# Altium PCB 20K Control Board V1.1.PcbDoc (part 2 of 24)
Units mm, origin at the board's own origin, x right, y up, seen from the top; angles counter-clockwise.
Board outline 132 x 260 mm, 4 copper layers (Top Layer, GND, VCC, Bottom Layer); 1384 components, 779 nets, 4515 pads, 1774 vias.
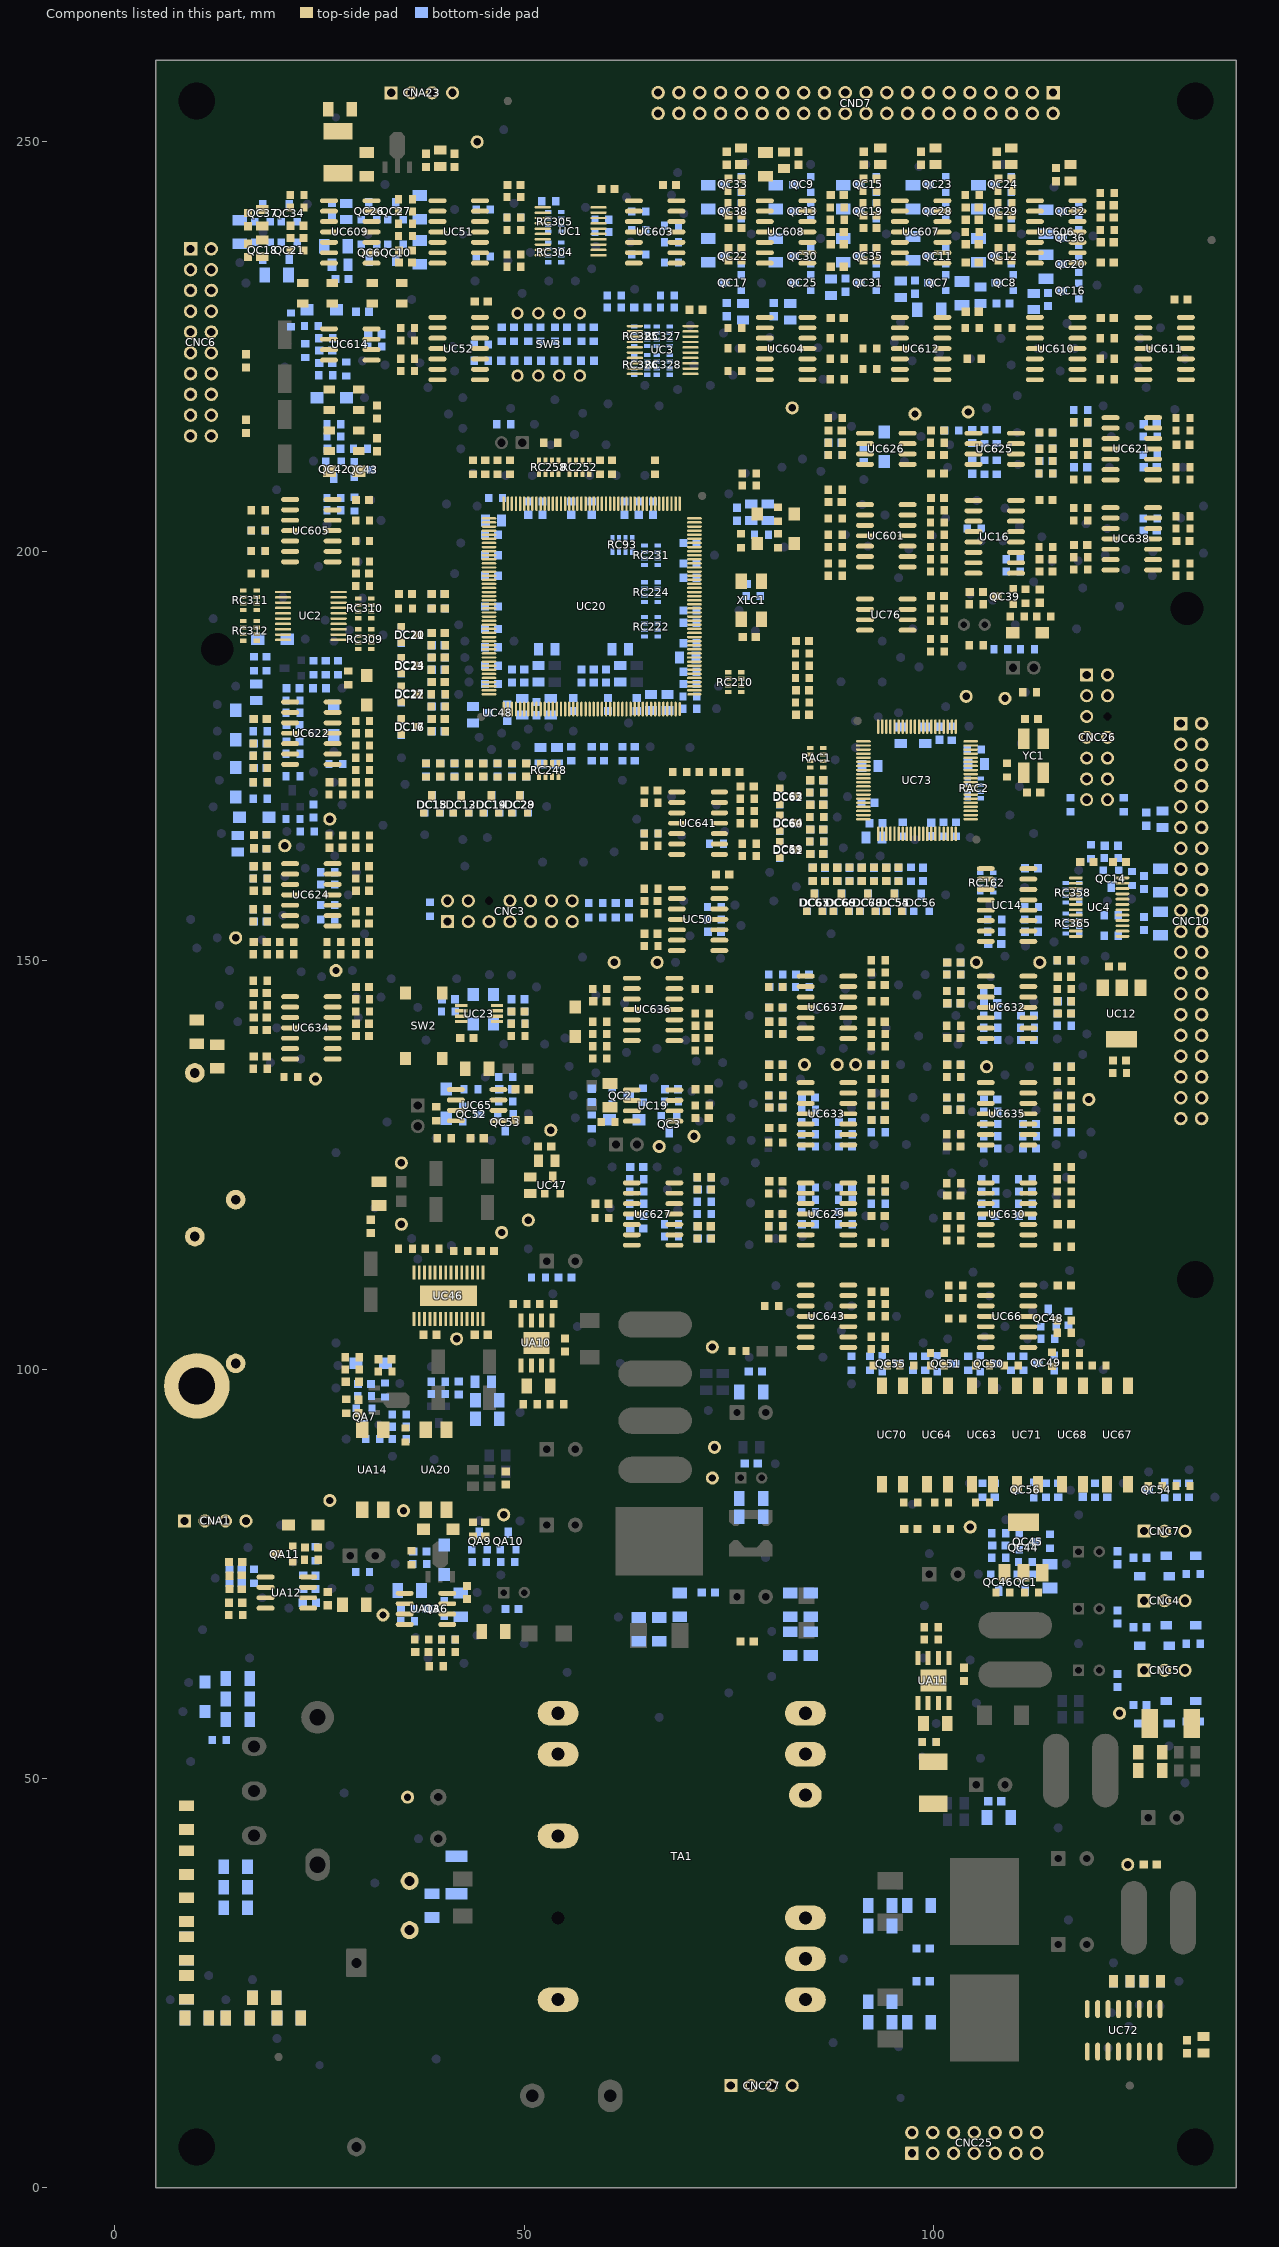
[diagram p4: the components of this part, seen from the top]

## Components (designator, comment, footprint, x,y, rotation, side; value= is the part's Value field where it differs from the comment) (continued)
QC45 "061-010000-0" SOT-23 110.5,78 r90 bottom locked (schematic designator QA4)
QC46 "061-110000-0" SOT-23 107,75 r0 bottom locked (schematic designator QA4)
QC48 "061-110000-0" SOT-23 115,105.25 r180 bottom locked
QC49 "061-010000-0" SOT-23 114.75,101.75 r270 bottom locked
QC50 "061-010000-0" SOT-23 105.75,99.75 r90 bottom locked
QC51 "061-010000-0" SOT-23 100.5,99.75 r90 bottom locked
QC52 "061-010000-0" SOT-23 42.5,130.25 r90 bottom locked
QC53 "061-110000-0" SOT-23 46.75,131.25 r0 bottom locked
QC54 "061-010000-0" SOT-23 128.25,86.25 r270 bottom locked
QC55 "061-010000-0" SOT-23 93.75,99.75 r90 bottom locked
QC56 "061-010000-0" SOT-23 112.25,86.25 r270 bottom locked
RA108 "011-470050-0" R3216-1206 66.5,68.25 r90 bottom locked
RA109 "011-470050-0" R3216-1206 64,68.25 r90 bottom locked
RA110 "013-390240-0" R3WA-5.0-S 36,37.5 r270 top locked
RA111 "011-000020-0" R1608-0603 51.75,111.25 r0 bottom locked
RA112 "NC" R3216-1206 77.75,97.25 r0 bottom locked
RA113 "011-103020-0" R1608-0603 54,95.75 r180 top locked
RA114 "011-227070-0" R5025-2010 41.75,38.25 r90 bottom locked
RA115 "011-103020-0" R1608-0603 52.75,108 r0 top locked
RA116 "011-152020-0" R1608-0603 50.75,95.75 r180 top locked
RA117 "011-322020-0" R1608-0603 49.5,108 r0 top locked
RA118 "011-470050-0" R3216-1206 82.5,66.5 r90 bottom locked
RA119 "011-302050-0" R3216-1206 77.75,82 r0 bottom locked
RA120 "NC" R3216-1206 77.75,84.25 r0 bottom locked
RA121 "011-470050-0" R3216-1206 85,66.5 r90 bottom locked
RA122 "NC" R1608-0603 30.25,75.25 r0 bottom locked
RA123 "011-100050-0" R3216-1206 46.25,68 r180 top locked
RA124 "011-104050-0" R3216-1206 8.75,45.25 r270 top locked
RA125 "011-104050-0" R3216-1206 21.25,20.75 r180 top locked
RA126 "011-000020-0" R1608-0603 101.25,80.5 r180 top locked
RA127 "011-470050-0" R3216-1206 93.5,22.75 r0 bottom locked
RA128 "011-104050-0" R3216-1206 8.75,39.75 r270 top locked
RA129 "011-302050-0" R3216-1206 126.5,53.25 r180 top locked
RA130 "011-104050-0" R3216-1206 18.25,23.25 r180 top locked
RA131 "011-470050-0" R3216-1206 93.5,20.25 r0 bottom locked
RA132 "NC" R3216-1206 126.5,51 r180 top locked
RA133 "011-103020-0" R1608-0603 99.5,54.5 r180 bottom locked
RA134 "011-103020-0" R1608-0603 99.75,68.5 r0 top locked
RA135 "011-104050-0" R3216-1206 8.75,34 r270 top locked
RA136 "011-104050-0" R3216-1206 15,20.75 r180 top locked
RA137 "NC" R3216-1206 108,45.25 r180 bottom locked
RA138 "011-272020-0" R1608-0603 99.5,54.5 r180 top locked
RA139 "011-104050-0" R3216-1206 8.75,29.25 r270 top locked
RA140 "011-322020-0" R1608-0603 99.75,67 r180 top locked
RA141 "011-104050-0" R3216-1206 10,20.75 r180 top locked
RA142 "011-104050-0" R3216-1206 8.75,24.5 r90 top locked
RA143 "011-470050-0" R3216-1206 93.5,34.5 r0 bottom locked
RA144 "011-470050-0" R3216-1206 93.5,32 r0 bottom locked
RA145 "011-680050-0" R3216-1206 15,57.25 r0 bottom locked
RA146 "NC" R3216-1206 15,62.25 r0 bottom locked
RA147 "011-491050-0" R3216-1206 42.25,71.25 r270 bottom locked
RA148 "011-680050-0" R3216-1206 15,59.75 r0 bottom locked
RA149 "011-102020-0" R1608-0603 14.75,70 r0 top locked
RA150 "011-103020-0" R1608-0603 12.75,54.75 r180 bottom locked
RA151 "011-493020-0" R1608-0603 23,74 r270 bottom locked
RA152 "011-307050-0" R3216-1206 14.75,39.25 r0 bottom locked
RA153 "011-307050-0" R3216-1206 14.75,36.75 r0 bottom locked
RA154 "011-307050-0" R3216-1206 14.75,34.25 r0 bottom locked
RA155 "011-102020-0" R1608-0603 33,97.5 r90 bottom locked
RA156 "011-103020-0" R1608-0603 37.25,76.25 r0 bottom locked
RA157 "011-403020-0" R1608-0603 40.75,67 r0 top locked
RA158 "011-332020-0" R1608-0603 34.75,93 r0 bottom locked
RA159 "011-103020-0" R1608-0603 34.75,94.5 r0 bottom locked
RA160 "011-332020-0" R1608-0603 34.75,91.5 r0 bottom locked
RA161 "011-202020-0" R1608-0603 39.25,63.75 r180 top locked
RA162 "011-333020-0" R1608-0603 40.75,65.5 r0 top locked
RA163 "011-103020-0" R1608-0603 30.5,96.75 r0 bottom locked
RA164 "011-153020-0" R1608-0603 37.5,67 r0 top locked
RA165 "011-122020-0" R1608-0603 44.5,76.5 r0 bottom locked
RA166 "011-472020-0" R1608-0603 15.5,74 r270 top locked
RA167 "011-332020-0" R1608-0603 36.25,77 r270 top locked
RA168 "011-102020-0" R1608-0603 31.5,91.5 r0 bottom locked
RA169 "011-332020-0" R1608-0603 48,76.5 r180 bottom locked
RA170 "011-331020-0" R1608-0603 29,101.5 r0 top locked
RA171 "011-493020-0" R1608-0603 40.75,67 r180 bottom locked
RA172 "011-106050-0" R3216-1206 8.75,29.25 r90 bottom locked
RA173 "011-494050-0" R3216-1206 21.25,20.75 r0 bottom locked
RA174 "011-494050-0" R3216-1206 18.25,23.25 r180 bottom locked
RA175 "011-106050-0" R3216-1206 8.75,24.5 r90 bottom locked
RA176 "011-494050-0" R3216-1206 10,20.75 r0 bottom locked
RA177 "011-494050-0" R3216-1206 15,20.75 r180 bottom locked
RA178 "011-472020-0" R1608-0603 14,74.75 r270 bottom locked
RA179 "011-303020-0" R1608-0603 35.75,69.25 r180 bottom locked
RA180 "011-123020-0" R1608-0603 29,100 r180 top locked
RA181 "011-103020-0" R1608-0603 28.25,95.5 r270 top locked
RA182 "NC" R1608-0603 24.5,77.5 r270 bottom locked
RA183 "NC" R1608-0603 24,76.75 r180 top locked
RA184 "011-332020-0" R1608-0603 33,99.75 r180 top locked
RA185 "011-472020-0" R1608-0603 17,74.75 r90 bottom locked
RA186 "011-472020-0" R1608-0603 43.75,80.5 r270 top locked
RA187 "011-102020-0" R1608-0603 39.5,98.5 r180 bottom locked
RA188 "011-104020-0" R1608-0603 39.5,97 r180 bottom locked
RA192 "011-143020-0" R1608-0603 76.25,102.25 r180 top locked (schematic designator RE1)
RA198 "011-102050-0" R3216-1206 45.5,96.25 r0 bottom locked
RA200 "011-102050-0" R3216-1206 45.5,94 r0 bottom locked
RA204 "011-202020-0" R1608-0603 35.5,92 r270 top locked
RA215 "011-472020-0" R1608-0603 45.25,80.5 r270 top locked
RAC1 "019-472000-0" R0603SM*4 85.75,174.75 r90 top locked
RAC2 "019-472000-0" R0603SM*4 105,171 r90 bottom locked
RC1 "011-103020-0" R1608-0603 30.25,160 r180 top locked
RC2 "011-492020-0" R1608-0603 26,159.25 r180 bottom locked
RC3 "011-272020-0" R1608-0603 59.5,118.5 r180 top locked
RC4 "011-272020-0" R1608-0603 30.25,165.25 r0 top locked
RC5 "011-273020-0" R0603SM 63.75,118.75 r0 bottom locked
RC6 "011-492020-0" R1608-0603 63.75,120.25 r0 bottom locked
RC7 "011-492020-0" R1608-0603 68,116.25 r0 bottom locked
RC8 "011-492020-0" R1608-0603 68,117.75 r180 bottom locked
RC9 "011-153020-0" R1608-0603 102.5,137.25 r180 bottom locked
RC10 "011-492020-0" R1608-0603 102.5,135.75 r180 top locked
RC11 "011-272020-0" R1608-0603 30.25,163.75 r0 top locked
RC12 "011-492020-0" R1608-0603 102.5,148.25 r180 top locked
RC13 "011-153020-0" R1608-0603 102.5,148.25 r180 bottom locked
RC14 "011-272020-0" R1608-0603 72,116 r0 top locked
RC15 "011-492020-0" R1608-0603 26,160.75 r180 bottom locked
RC16 "011-491020-0" R1608-0603 102.5,135.75 r0 bottom locked
RC17 "011-153020-0" R1608-0603 102.5,133.25 r0 top locked
RC18 "011-491020-0" R1608-0603 102.5,149.75 r0 bottom locked
RC19 "011-492020-0" R1608-0603 63.75,121.75 r180 bottom locked
RC20 "011-103020-0" R1608-0603 27,165.25 r180 top locked
RC21 "011-273020-0" R0603SM 63.75,123.25 r0 bottom locked
RC22 "011-153020-0" R1608-0603 102.5,146.25 r0 top locked
RC23 "011-101020-0" R1608-0603 107,130 r0 bottom locked
RC24 "011-101020-0" R1608-0603 107,143.25 r0 bottom locked
RC25 "011-492020-0" R1608-0603 102.5,133.25 r180 bottom locked
RC26 "011-103020-0" R1608-0603 107,131.5 r0 bottom locked
RC27 "011-103020-0" R0603SM 35.5,240 r180 top locked
RC28 "011-103020-0" R0603SM 44.75,225.25 r0 bottom locked
RC29 "011-492020-0" R1608-0603 102.5,146.25 r180 bottom locked
RC30 "011-103020-0" R1608-0603 30.25,156 r0 top locked
RC31 "011-103020-0" R1608-0603 107,146.25 r0 bottom locked
RC32 "011-492020-0" R1608-0603 26,156.75 r180 bottom locked
RC33 "011-272020-0" R1608-0603 26.75,152.25 r180 top locked
RC34 "011-101020-0" R1608-0603 107,128.5 r0 bottom locked
RC35 "011-103020-0" R1608-0603 102.5,128.75 r0 top locked
RC36 "011-103020-0" R0603SM 105,223.5 r0 top locked
RC37 "011-103020-0" R1608-0603 102.5,142 r0 top locked
RC38 "011-102020-0" R1608-0603 116,132 r180 top locked
RC39 "011-272020-0" R1608-0603 26.75,150.75 r180 top locked
RC40 "011-103020-0" R0603SM 92.25,224.75 r180 top locked
RC41 "011-102020-0" R1608-0603 116,145 r180 top locked
RC42 "011-101020-0" R1608-0603 107,141.75 r0 bottom locked
RC43 "011-103020-0" R0603SM 73.25,156.5 r0 bottom locked
RC44 "011-103020-0" R1608-0603 116,146.5 r0 top locked
RC45 "011-103020-0" R1608-0603 116,135.25 r0 top locked
RC46 "011-492020-0" R1608-0603 26,155 r180 bottom locked
RC47 "011-103050-0" R1206SM 114.25,74.75 r270 bottom locked
RC48 "011-103020-0" R1608-0603 30.25,150.75 r0 top locked
RC49 "011-101020-0" R0603SM 111.25,76.5 r180 bottom locked
RC50 "011-491020-0" R1608-0603 116,137 r180 top locked
RC51 "011-102020-0" R1608-0603 116,129 r180 bottom locked
RC52 "011-491020-0" R1608-0603 116,150 r180 top locked
RC53 "011-102020-0" R1608-0603 116,142 r180 bottom locked
RC54 "011-103020-0" R1608-0603 17.75,156.25 r180 bottom locked
RC55 "011-491020-0" R1608-0603 116,137 r180 bottom locked
RC56 "011-491020-0" R1608-0603 116,150 r180 bottom locked
RC57 "011-101020-0" R1608-0603 17.75,156.25 r180 top locked
RC58 "011-304021-0" R1608-0603 107,127 r180 bottom locked
RC59 "011-304021-0" R1608-0603 111.75,128.5 r180 bottom locked
RC60 "011-272020-0" R1608-0603 21,152.25 r180 top locked
RC61 "011-103020-0" R1608-0603 116,132 r180 bottom locked
RC62 "011-304021-0" R1608-0603 107,140.25 r180 bottom locked
RC63 "011-304021-0" R1608-0603 111.5,141.75 r180 bottom locked
RC64 "011-103020-0" R1608-0603 116,143.5 r180 bottom locked
RC65 "011-272020-0" R1608-0603 93.25,115.5 r0 top locked
RC66 "011-273020-0" R0603SM 84.75,119.25 r0 bottom locked
RC67 "011-492020-0" R1608-0603 84.75,120.75 r0 bottom locked
RC68 "011-492020-0" R1608-0603 80.75,117.5 r0 bottom locked
RC69 "011-101020-0" R1608-0603 17.75,154.75 r180 top locked
RC70 "011-492020-0" R1608-0603 80.75,117.5 r180 top locked
RC71 "011-103020-0" R1608-0603 17.75,150.75 r180 top locked
RC72 "011-272020-0" R1608-0603 80.75,116 r180 top locked
RC73 "011-492020-0" R1608-0603 84.75,122.25 r180 bottom locked
RC74 "011-103020-0" R1608-0603 17.75,160 r180 top locked
RC75 "011-273020-0" R0603SM 80.75,121.5 r180 top locked
RC76 "011-101020-0" R1608-0603 17.75,160 r180 bottom locked
RC77 "011-101020-0" R0603SM 108.5,72.75 r0 top locked
RC78 "011-202020-0" R0603SM 108,80 r180 bottom locked
RC79 "011-272020-0" R1608-0603 18.5,164.5 r90 bottom locked
RC80 "011-103020-0" R0603SM 112,72.75 r180 top locked
RC81 "011-302020-0" R0603SM 131.75,57 r0 bottom locked
RC82 "011-302020-0" R0603SM 131.75,66.5 r0 bottom locked
RC83 "011-153020-0" R1608-0603 80.75,135.75 r0 bottom locked
RC84 "011-492020-0" R1608-0603 80.75,135.75 r0 top locked
RC85 "011-302020-0" R0603SM 131.75,75 r0 bottom locked
RC86 "011-000020-0" R0603SM 114.25,79 r90 bottom locked
RC87 "011-101020-0" R1608-0603 17.75,161.5 r180 bottom locked
RC88 "011-103020-0" R1608-0603 18.5,164.5 r270 top locked
RC89 "011-103020-0" R0603SM 108,77 r0 bottom locked
RC90 "011-472020-0" R0603SM 102.75,166 r90 bottom locked
RC91 "011-491020-0" R1608-0603 80.75,137.25 r0 bottom locked
RC92 "011-472020-0" R0603SM 101.25,166 r90 bottom locked
RC93 "019-472000-0" R0603SM*4 62,200.75 r0 bottom locked
RC94 "011-153020-0" R1608-0603 80.75,133.5 r0 top locked
RC95 "011-472020-0" R0603SM 66,210.25 r90 top locked
RC99 "011-101020-0" R1608-0603 84.75,130.25 r0 bottom locked
RC100 "011-492020-0" R1608-0603 80.75,133.5 r180 bottom locked
RC101 "011-103020-0" R1608-0603 84.75,131.75 r0 bottom locked
RC103 "011-403020-0" R1608-0603 106.25,210.25 r270 bottom locked
RC104 "011-492020-0" R0603SM 107.75,210.25 r90 bottom locked
RC105 "011-272020-0" R1608-0603 102.25,214.75 r0 bottom locked
RC106 "011-101020-0" R1608-0603 84.75,128.75 r0 bottom locked
RC107 "011-103020-0" R1608-0603 80.75,127.75 r0 top locked
RC108 "011-102020-0" R1608-0603 93.25,132.25 r180 top locked
RC109 "011-492020-0" R1608-0603 88,213.25 r180 top locked
RC110 "011-492020-0" R1608-0603 88,216.25 r0 top locked
RC111 "011-272020-0" R1608-0603 102.5,115.75 r180 top locked
RC112 "011-103020-0" R1608-0603 93.25,135.5 r0 top locked
RC113 "011-273020-0" R0603SM 106.75,120.25 r0 bottom locked
RC114 "011-103020-0" R1608-0603 80.75,146.75 r180 top locked
RC115 "011-512020-0" R1608-0603 88,211.75 r180 top locked
RC116 "011-492020-0" R1608-0603 106.75,121.75 r0 bottom locked
RC117 "011-492020-0" R1608-0603 102.5,118.75 r0 bottom locked
RC118 "011-492020-0" R0603SM 107.75,214 r270 bottom locked
RC119 "011-491020-0" R1608-0603 84,146.75 r180 bottom locked
RC122 "011-492020-0" R1608-0603 102.5,117.25 r180 top locked
RC124 "011-492020-0" R1608-0603 88,211.75 r180 bottom locked
RC125 "011-323020-0" R1608-0603 91.5,211.75 r270 bottom locked
RC126 "011-403020-0" R1608-0603 106.25,214 r270 bottom locked
RC127 "011-491020-0" R1608-0603 93.25,137.25 r180 bottom locked
RC128 "011-272020-0" R1608-0603 116,115 r0 top locked
RC129 "011-203020-0" R1608-0603 59.25,138 r0 top locked
RC130 "011-000020-0" R1608-0603 59.25,141 r180 top locked
RC131 "011-102020-0" R1608-0603 93.25,129 r180 bottom locked
RC132 "011-492020-0" R1608-0603 106.75,123.25 r180 bottom locked
RC133 "011-103020-0" R1608-0603 80.75,148.25 r180 bottom locked
RC134 "NC" R1608-0603 59.25,142.5 r180 top locked
RC135 "011-492020-0" R1608-0603 100.5,213.25 r0 top locked
RC136 "011-273020-0" R0603SM 102.5,122.75 r180 top locked
RC137 "011-491020-0" R1608-0603 93.25,137.25 r180 top locked
RC138 "011-304021-0" R1608-0603 84.75,127.25 r180 bottom locked
RC139 "011-304021-0" R1608-0603 89.25,128.75 r180 bottom locked
RC140 "011-103020-0" R1608-0603 93.25,132.25 r180 bottom locked
RC142 "011-403020-0" R1608-0603 113.75,209.5 r0 bottom locked
RC143 "011-103020-0" R1608-0603 80.75,141 r0 top locked
RC144 "011-103020-0" R1608-0603 80.75,142.5 r0 bottom locked
RC145 "011-492020-0" R1608-0603 113.75,212.5 r180 bottom locked
RC146 "011-272020-0" R1608-0603 113.75,209.5 r0 top locked
RC147 "011-103020-0" R1608-0603 80.75,141 r180 bottom locked
RC148 "011-472020-0" R1608-0603 76.5,201.25 r90 top locked
RC149 "011-491020-0" R1608-0603 71.75,139 r180 top locked
RC150 "011-472020-0" R1608-0603 80.75,144.25 r0 bottom locked
RC151 "011-492020-0" R1608-0603 113.75,214.5 r180 bottom locked
RC152 "011-403020-0" R1608-0603 113.75,211 r180 top locked
RC153 "011-472020-0" R1608-0603 81,204.5 r90 top locked
RC154 "011-104020-0" R1608-0603 81,201.25 r270 top locked
RC157 "011-103020-0" R1608-0603 71.75,143.5 r0 top locked
RC158 "011-103020-0" R1608-0603 122.75,136.25 r180 top locked
RC161 "011-472020-0" R1608-0603 71.75,146.5 r0 top locked
RC162 "019-472000-0" RN0603*4 106.5,159.5 r90 bottom locked
RC163 "011-492020-0" R1608-0603 93.25,141 r180 top locked
RC164 "011-102020-0" R1608-0603 118,203.75 r180 top locked
RC165 "011-103020-0" R1608-0603 72,117.5 r180 bottom locked
RC166 "011-272020-0" R1608-0603 118,205.25 r180 top locked
RC167 "011-492020-0" R1608-0603 72,119 r180 bottom locked
RC168 "011-492020-0" R1608-0603 72,122 r0 top locked
RC169 "011-492020-0" R1608-0603 72,123.5 r180 top locked
RC170 "011-472020-0" R1608-0603 112,156.5 r180 bottom locked
RC171 "011-272020-0" R1608-0603 93.25,139.5 r0 top locked
RC172 "011-102020-0" R1608-0603 107.5,153.5 r180 bottom locked
RC173 "011-472020-0" R1608-0603 107.5,155 r180 bottom locked
RC174 "011-492020-0" R1608-0603 93.25,148.5 r180 top locked
RC175 "011-272020-0" R1608-0603 93.25,150 r0 top locked
RC176 "011-102020-0" R1608-0603 112,155 r0 bottom locked
RC177 "011-492020-0" R1608-0603 72,120.5 r180 bottom locked
RC178 "011-103020-0" R1608-0603 72,123.5 r180 bottom locked
RC179 "011-103020-0" R1608-0603 89.25,117.75 r0 bottom locked
RC180 "011-492020-0" R1608-0603 93.25,120.25 r180 bottom locked
RC181 "011-492020-0" R1608-0603 93.25,121.75 r0 top locked
RC182 "011-494050-0" R3216-1206 12.5,138.25 r90 top locked
RC183 "011-272020-0" R1608-0603 21.5,135.75 r0 top locked
RC184 "011-492020-0" R1608-0603 93.25,123.25 r180 top locked
RC185 "013-515220-1" R3W-S 9.75,126.25 r270 top locked
RC186 "011-102020-0" R1608-0603 118,199.25 r180 top locked
RC187 "011-272020-0" R1608-0603 130.5,197 r180 top locked
RC188 "011-333020-0" R1608-0603 17.75,136.75 r0 top locked
RC189 "011-272020-0" R1608-0603 118,197.75 r180 top locked
RC190 "011-102020-0" R1608-0603 130.5,198.5 r180 top locked
RC191 "011-492020-0" R1608-0603 93.25,121.75 r180 bottom locked
RC192 "011-103020-0" R1608-0603 89.25,120.75 r0 bottom locked
RC193 "011-472020-0" R1608-0603 113.75,200.5 r0 top locked
RC194 "011-472020-0" R1608-0603 105,202.75 r180 bottom locked
RC195 "013-515220-1" R3W-S 14.75,110.75 r270 top locked
RC196 "011-102020-0" R1608-0603 109.75,199 r180 bottom locked
RC197 "011-102020-0" R1608-0603 109.75,197.5 r180 bottom locked
RC198 "011-103020-0" R1608-0603 111.25,120.25 r0 bottom locked
RC199 "011-492020-0" R1608-0603 116,120.25 r180 top locked
RC200 "011-492020-0" R1608-0603 116,124.75 r0 top locked
RC201 "011-492020-0" R1608-0603 116,123.25 r180 top locked
RC202 "011-492020-0" R1608-0603 116,121.75 r180 top locked
RC203 "011-103020-0" R1608-0603 111.25,123.25 r0 bottom locked
RC204 "011-202050-0" R3216-1206 60.5,133.5 r90 top locked
RC205 "011-102020-0" R1608-0603 60.25,130.25 r180 top locked
RC206 "011-493020-0" R1608-0603 71.75,132.25 r0 top locked
RC207 "011-491020-0" R1608-0603 47.5,215.5 r0 bottom locked
RC208 "011-102020-0" R1608-0603 64.5,133.5 r270 bottom locked
RC210 "019-472000-0" RN0603*4 75.75,184 r270 top locked
RC211 "011-102020-0" R1608-0603 58.25,130.25 r270 bottom locked
RC212 "011-472020-0" R1608-0603 48.25,210.25 r90 top locked
RC213 "011-102020-0" R1608-0603 68,132.75 r0 bottom locked
RC214 "011-472020-0" R1608-0603 46.75,210.25 r90 top locked
RC215 "011-472020-0" R1608-0603 45.25,210.25 r90 top locked
RC216 "011-472020-0" R1608-0603 43.75,210.25 r90 top locked
RC217 "011-472020-0" R1608-0603 46.5,206.5 r180 bottom locked
RC218 "011-101020-0" R1608-0603 41.5,173.25 r90 top locked
RC219 "011-101020-0" R1608-0603 43.25,173.25 r90 bottom locked
RC220 "011-101020-0" R1608-0603 45,173.25 r90 bottom locked
RC221 "011-102020-0" R1608-0603 84,184.5 r0 top locked
RC222 "019-472000-0" RN0603*4 65.5,190.75 r270 bottom locked
RC223 "011-472020-0" R1608-0603 100.5,203.5 r180 top locked
RC224 "019-472000-0" RN0603*4 65.5,195 r270 bottom locked
RC225 "011-472020-0" R1608-0603 35.5,193 r0 top locked
RC226 "011-472020-0" R1608-0603 100.5,205 r180 top locked
RC227 "011-472020-0" R1608-0603 39.5,193 r180 bottom locked
RC228 "011-101020-0" R1608-0603 39.5,179.5 r0 bottom locked
RC229 "011-101020-0" R1608-0603 39.5,178 r0 top locked
RC230 "011-101020-0" R1608-0603 38,173.25 r90 top locked
RC231 "019-472000-0" RN0603*4 65.5,199.5 r270 bottom locked
RC232 "011-472020-0" R1608-0603 88,204 r0 top locked
RC233 "011-101020-0" R1608-0603 88,207.5 r0 top locked
RC234 "011-103020-0" R0603SM 39.5,182.5 r0 top locked
RC235 "011-103020-0" R0603SM 39.5,182.5 r0 bottom locked
RC236 "011-472020-0" R1608-0603 77.5,208 r0 top locked
RC237 "011-472020-0" R1608-0603 77.5,209.5 r0 top locked
RC238 "011-272020-0" R1608-0603 88,200.5 r180 top locked
RC239 "011-472020-0" R1608-0603 88,202 r0 top locked
RC240 "011-101020-0" R1608-0603 39.75,173.25 r90 bottom locked
RC241 "011-101020-0" R1608-0603 46.75,173.25 r90 top locked
RC244 "011-472020-0" R1608-0603 100.5,199 r180 top locked
RC245 "011-472020-0" R1608-0603 100.5,197.5 r0 top locked
RC247 "011-223020-0" R1608-0603 55.75,175.25 r90 bottom locked
RC248 "019-472000-0" RN0603*4 53,173.25 r0 top locked
RC250 "011-472020-0" R1608-0603 100.5,202 r180 top locked
RC251 "011-472020-0" R1608-0603 100.5,200.5 r0 top locked
RC252 "019-472000-0" RN0603*4 56.75,210.25 r0 top locked
RC253 "011-472020-0" R1608-0603 88,198.5 r0 top locked
RC254 "011-472020-0" R1608-0603 88,197 r180 top locked
RC255 "011-101020-0" R1608-0603 39.5,190 r0 bottom locked
RC256 "011-101020-0" R1608-0603 39.5,188.5 r0 top locked
RC257 "011-102020-0" R1608-0603 62,175.25 r90 bottom locked
RC258 "019-472000-0" RN0603*4 53,210.25 r0 top locked
RC259 "011-472020-0" R1608-0603 63.5,175.25 r90 bottom locked
RC262 "011-472020-0" R1608-0603 53.25,213.25 r0 top locked
RC263 "011-101020-0" R1608-0603 39.5,184 r0 bottom locked
RC264 "011-101020-0" R1608-0603 39.5,187 r0 bottom locked
RC265 "011-101020-0" R1608-0603 39.5,185.5 r0 top locked
RC266 "011-475020-0" R1608-0603 78,194.5 r0 bottom locked
RC267 "011-472020-0" R1608-0603 65.5,165.5 r180 bottom locked
RC268 "011-472020-0" R1608-0603 72.25,173 r180 top locked
RC269 "011-103020-0" R1608-0603 49.25,143.75 r0 bottom locked
RC270 "011-103020-0" R1608-0603 40.75,143.75 r180 bottom locked
RC271 "011-103020-0" R1608-0603 49.25,142.25 r180 bottom locked
RC272 "011-472020-0" R1608-0603 69,173 r0 top locked
RC273 "011-101020-0" R1608-0603 39.5,181 r0 top locked
RC274 "011-101020-0" R1608-0603 48.5,173.25 r90 top locked
RC275 "011-101020-0" R1608-0603 50.25,173.25 r90 bottom locked
RC276 "011-103020-0" R1608-0603 58.5,226.5 r270 bottom locked
RC277 "011-103020-0" R1608-0603 55.25,226.5 r270 bottom locked
RC278 "011-103020-0" R1608-0603 52,226.5 r270 bottom locked
RC279 "011-103020-0" R1608-0603 48.75,226.5 r270 bottom locked
RC280 "011-331020-0" R1608-0603 65.5,169.25 r0 top locked
RC281 "011-101020-0" R1608-0603 57,226.5 r270 bottom locked
RC282 "011-101020-0" R1608-0603 53.75,226.5 r270 bottom locked
RC283 "011-202020-0" R1608-0603 38.5,156.25 r90 bottom locked
RC284 "011-493020-0" R1608-0603 49.25,140.75 r180 top locked
RC285 "011-101020-0" R1608-0603 50.5,226.5 r270 bottom locked
RC286 "011-101020-0" R1608-0603 47.25,226.5 r270 bottom locked
RC287 "011-103020-0" R1608-0603 58.75,155.25 r180 bottom locked
RC288 "011-103020-0" R1608-0603 49.25,142.25 r180 top locked
RC289 "011-103020-0" R1608-0603 58.75,157 r0 bottom locked
RC290 "011-103020-0" R1608-0603 53,242.75 r0 bottom locked
RC291 "011-472020-0" R1608-0603 64,239.25 r0 bottom locked
RC292 "011-103020-0" R1608-0603 59.5,240.5 r180 bottom locked
RC293 "011-472020-0" R1608-0603 108.75,227.25 r180 top locked
RC294 "011-472020-0" R1608-0603 64,236.25 r0 bottom locked
RC295 "011-472020-0" R1608-0603 30.25,198.75 r0 top locked
RC296 "011-103020-0" R1608-0603 17.5,197.25 r0 top locked
RC297 "011-472020-0" R1608-0603 64,241.5 r0 bottom locked
RC298 "011-103020-0" R1608-0603 30.25,195.75 r180 top locked
RC299 "011-472020-0" R1608-0603 30.25,201.25 r0 top locked
RC300 "011-472020-0" R1608-0603 68,239.75 r180 bottom locked
RC301 "011-472020-0" R1608-0603 121.25,226 r0 top locked
RC302 "011-472020-0" R1608-0603 30.25,203.75 r0 top locked
RC304 "019-472000-0" RN0603*4 53.75,236.5 r270 bottom locked
RC305 "019-472000-0" RN0603*4 53.75,240.25 r270 bottom locked
RC307 "011-472020-0" R1608-0603 17.5,205 r180 top locked
RC308 "011-472020-0" R1608-0603 68,237.75 r180 bottom locked
RC309 "019-472000-0" RN0603*4 30.5,189.25 r270 top locked
RC310 "019-472000-0" RN0603*4 30.5,193 r270 top locked
RC311 "019-472000-0" RN0603*4 16.5,194 r90 top locked
RC312 "019-472000-0" RN0603*4 16.5,190.25 r90 top locked
RC313 "011-472020-0" R1608-0603 121.25,223.5 r0 top locked
RC314 "011-102020-0" R1608-0603 61,229.75 r180 bottom locked
RC315 "011-472020-0" R1608-0603 68,235.25 r180 bottom locked
RC316 "011-103020-0" R1608-0603 61,231.25 r180 bottom locked
RC317 "011-103020-0" R1608-0603 67.5,229.75 r180 bottom locked
RC318 "011-472020-0" R1608-0603 88.25,226 r0 top locked
RC320 "011-472020-0" R1608-0603 121.25,221 r0 top locked
RC321 "011-472020-0" R1608-0603 75.75,227.25 r180 top locked
RC322 "011-202050-0" R3216-1206 30.75,247.25 r90 top locked
RC323 "011-472020-0" R1608-0603 75.75,222 r180 top locked
RC324 "011-472020-0" R1608-0603 104.75,227.25 r0 top locked
RC325 "019-472000-0" RN0603*4 64.25,226.25 r90 bottom locked
RC326 "019-472000-0" RN0603*4 64.25,222.75 r90 bottom locked
RC327 "019-472000-0" RN0603*4 67,226.25 r270 bottom locked
RC328 "019-472000-0" RN0603*4 67,222.75 r270 bottom locked
RC330 "011-472020-0" R1608-0603 31.75,225 r180 bottom locked
RC331 "011-472020-0" R1608-0603 75.75,224.79 r180 top locked
RC332 "011-472020-0" R1608-0603 88.25,223.5 r0 top locked
RC333 "011-472020-0" R1608-0603 92.25,222.25 r180 top locked
RC336 "011-472020-0" R1608-0603 88.25,221 r0 top locked
RC337 "011-472020-0" R1608-0603 21.5,228.25 r270 bottom locked
RC339 "011-272020-0" R1608-0603 25.75,226 r0 bottom locked
RC340 "011-472020-0" R1608-0603 24,227.5 r180 bottom locked
RC344 "011-752020-0" R1608-0603 28.25,222.25 r270 bottom locked
RC345 "011-242020-0" R1608-0603 25.75,221.5 r180 bottom locked
RC346 "011-203020-0" R1608-0603 23.25,224.5 r90 bottom locked
RC349 "011-512020-0" R1608-0603 35.5,241.5 r0 top locked
RC350 "011-472020-0" R1608-0603 104.75,239 r0 top locked
RC352 "011-472020-0" R1608-0603 108.75,242.5 r180 top locked
RC353 "011-472020-0" R1608-0603 88.25,242 r0 top locked
RC354 "011-510050-0" R3216-1206 37.25,236.5 r90 bottom locked
RC355 "011-510050-0" R3216-1206 97.5,237 r90 bottom locked
RC356 "011-510050-0" R3216-1206 105.5,236.75 r90 bottom locked
RC357 "011-510050-0" R3216-1206 80.75,243.25 r90 bottom locked
RC358 "019-472000-0" RN0603*4 117,158.25 r90 bottom locked
RC359 "011-103020-0" R1608-0603 124.25,160 r90 bottom locked
RC360 "011-102020-0" R1608-0603 119.25,163.25 r90 bottom locked
RC361 "011-472020-0" R1608-0603 92.25,244 r180 top locked
RC362 "011-472020-0" R1608-0603 121.25,239.25 r0 top locked
RC363 "011-512020-0" R1608-0603 22.25,242 r180 top locked
RC364 "011-472020-0" R1608-0603 75.75,242.5 r180 top locked
RC365 "019-472000-0" RN0603*4 117,154.5 r90 bottom locked
RC366 "011-492020-0" R1608-0603 121.75,162.5 r180 bottom locked
RC367 "011-510050-0" R3216-1206 89,243.25 r90 bottom locked
RC368 "011-510050-0" R3216-1206 113.75,234.75 r90 bottom locked
RC369 "011-510050-0" R3216-1206 19.75,233.75 r180 bottom locked
RC370 "011-510050-0" R3216-1206 72.5,236.75 r90 bottom locked
RC371 "011-472020-0" R1608-0603 104.75,243.5 r0 top locked
RC372 "011-472020-0" R1608-0603 108.75,244 r180 top locked
RC373 "011-472020-0" R1608-0603 88.25,240.5 r0 top locked
RC374 "011-512020-0" R1608-0603 35.5,243 r0 top locked
RC376 "011-510050-0" R3216-1206 97.5,243.25 r90 bottom locked
RC377 "011-510050-0" R3216-1206 105.5,243.25 r90 bottom locked
RC378 "011-510050-0" R3216-1206 80.75,236.75 r90 bottom locked
RC379 "011-510050-0" R3216-1206 37.25,242 r270 bottom locked
RC381 "011-472020-0" R1608-0603 79,202 r0 bottom locked
RC382 "011-472020-0" R1608-0603 80.25,107.75 r0 top locked
RC383 "011-472020-0" R1608-0603 92.25,242.5 r180 top locked
RC384 "011-472020-0" R1608-0603 121.25,243.75 r0 top locked
RC385 "011-472020-0" R1608-0603 75.75,244 r180 top locked
RC386 "011-512020-0" R1608-0603 22.25,243.5 r180 top locked
RC387 "011-510050-0" R3216-1206 89,236.75 r90 bottom locked
RC388 "011-510050-0" R3216-1206 113.75,240.25 r90 bottom locked
RC389 "011-510050-0" R3216-1206 72.5,243.25 r90 bottom locked
RC390 "011-510050-0" R3216-1206 15.25,239 r270 bottom locked
RC443 "011-102020-0" R1608-0603 17.75,175 r180 top locked
RC444 "011-102020-0" R1608-0603 17.75,173.5 r0 top locked
RC445 "011-102020-0" R1608-0603 17.75,176.5 r180 top locked
RC446 "011-102020-0" R1608-0603 17.75,175 r0 bottom locked
RC447 "011-491020-0" R1608-0603 130.5,204.25 r180 top locked
RC448 "011-153020-0" R1608-0603 130.5,202.75 r0 top locked
RC449 "011-103020-0" R1608-0603 21.75,180.25 r180 bottom locked
RC450 "011-103020-0" R1608-0603 21.75,181.75 r180 bottom locked
RC451 "011-642020-0" R1608-0603 21.75,172.5 r0 bottom locked
RC452 "011-642020-0" R1608-0603 18.5,186.25 r270 bottom locked
RC453 "011-103020-0" R1608-0603 17.75,171.75 r0 top locked
RC454 "011-203020-0" R1608-0603 126.5,204 r180 bottom locked
RC455 "011-102020-0" R1608-0603 105.25,193.5 r0 top locked
RC456 "011-103020-0" R1608-0603 17.75,178 r0 bottom locked
RC457 "011-102020-0" R1608-0603 23.5,165.75 r0 bottom locked
RC458 "011-104020-0" R1608-0603 17.75,169.75 r180 bottom locked
RC459 "NC/0603" R1608-0603 113.5,192 r180 top locked
RC460 "011-102020-0" R1608-0603 25.75,185.75 r270 bottom locked
RC461 "011-104020-0" R1608-0603 17,186.25 r270 bottom locked
RC462 "NC/0603" R1608-0603 110.25,192 r180 top locked
RC463 "011-494020-0" R1608-0603 17.75,171.75 r180 bottom locked
RC464 "011-494020-0" R1608-0603 17.75,179.5 r180 bottom locked
RC465 "011-472020-0" R1608-0603 105.25,188.5 r180 top locked
RC466 "011-493020-0" R1608-0603 21.75,167.25 r0 bottom locked
RC467 "011-493020-0" R1608-0603 24.25,185.75 r90 bottom locked
RC469 "NC/0603" R1608-0603 111.25,194.5 r90 top locked
RC470 "011-491020-0" R1608-0603 118,215.75 r0 top locked
RC471 "011-153020-0" R1608-0603 118,217.25 r180 bottom locked
RC472 "011-203020-0" R1608-0603 118,215.75 r180 bottom locked
RC473 "011-472020-0" R1608-0603 28.5,184.5 r90 top locked
RC474 "011-472020-0" R1608-0603 27.25,185.75 r90 bottom locked
RC477 "011-491020-0" R1608-0603 27,170.25 r0 top locked
RC478 "011-491020-0" R1608-0603 118,208.75 r0 top locked
RC479 "011-153020-0" R1608-0603 118,211.75 r180 top locked
RC480 "011-491020-0" R1608-0603 21.75,175.25 r0 bottom locked
RC481 "011-203020-0" R1608-0603 118,211.75 r180 bottom locked
RC482 "011-682020-0" R1608-0603 30.25,174.75 r180 top locked
RC483 "NC" R1608-0603 30.25,179.25 r0 top locked
RC484 "NC" R1608-0603 27,174 r180 bottom locked
RC485 "011-103020-0" R1608-0603 30.25,176.25 r180 top locked
RC486 "011-682020-0" R1608-0603 30.25,173.25 r180 top locked
RC487 "011-491020-0" R1608-0603 130.5,208.75 r180 top locked
RC488 "011-153020-0" R1608-0603 130.5,210.25 r0 top locked
RC489 "011-103020-0" R1608-0603 30.25,170.25 r180 top locked
RC490 "011-203020-0" R1608-0603 26.75,215.5 r0 bottom locked
RC491 "011-203020-0" R1608-0603 126.5,211.75 r180 bottom locked
RC492 "NC/0603" R0603SM 26.75,214 r180 bottom locked
RC493 "011-203020-0" R1608-0603 26.75,205 r0 bottom locked
RC494 "011-203020-0" R1608-0603 29.25,205.75 r90 bottom locked
RC495 "011-203020-0" R1608-0603 26.75,206.5 r180 bottom locked
RC496 "011-491020-0" R1608-0603 130.5,216.25 r180 top locked
RC497 "011-153020-0" R1608-0603 130.5,214.75 r0 top locked
RC498 "011-202020-0" R1608-0603 30,212.5 r0 bottom locked
RC499 "011-203020-0" R1608-0603 126.5,214 r180 bottom locked
RC500 "011-104020-0" R0603SM 42.25,114.5 r180 top locked
RC501 "011-202050-0" R3216-1206 32.25,121.5 r270 top locked
RC502 "011-153020-0" R1608-0603 38.75,114.75 r0 top locked
RC503 "011-243020-0" R1608-0603 35.5,114.75 r0 top locked
RC504 "011-202050-0" R3216-1206 44.25,136.75 r0 top locked
RC505 "011-472020-0" R1608-0603 116,104.5 r180 top locked
RC506 "011-204020-0" R1608-0603 17,164.5 r270 bottom locked
RC507 "011-204020-0" R1608-0603 21,150.75 r0 top locked
RC510 "011-472020-0" R1608-0603 121.75,155.5 r180 bottom locked
RC511 "011-131020-0" R1608-0603 59.25,139.5 r0 top locked
RC512 "011-472020-0" R1608-0603 121.75,153 r180 bottom locked
RC513 "011-472020-0" R1608-0603 70.25,180.75 r180 bottom locked
RC514 "011-472020-0" R1608-0603 70.25,182.25 r180 bottom locked
RC515 "011-472020-0" R1608-0603 105,175.75 r0 bottom locked
RC516 "011-472020-0" R1608-0603 48.75,234.75 r0 top locked
RC517 "011-472020-0" R1608-0603 48.75,236.25 r0 top locked
RC518 "011-102020-0" R1608-0603 67.5,231.25 r0 bottom locked
RC519 "011-102020-0" R1608-0603 59.5,239 r0 bottom locked
RC520 "011-103020-0" R1608-0603 35.75,222 r180 top locked
RC521 "011-103020-0" R1608-0603 35.75,223.5 r180 top locked
RC522 "011-103020-0" R1608-0603 48.75,239.25 r180 top locked
RC523 "011-103020-0" R1608-0603 48.75,240.75 r180 bottom locked
RC524 "011-103020-0" R1608-0603 48.75,240.75 r180 top locked
RC525 "011-103020-0" R1608-0603 48.75,243.25 r180 top locked
RC526 "011-103020-0" R1608-0603 35.5,238.5 r0 top locked
RC527 "011-103020-0" R1608-0603 45,241.75 r180 bottom locked
RC528 "011-103020-0" R1608-0603 45,236 r180 bottom locked
RC529 "011-103020-0" R1608-0603 35.75,227.25 r0 top locked
RC530 "011-103020-0" R1608-0603 35.75,225.75 r0 top locked
RC531 "011-103020-0" R1608-0603 44.75,223.25 r180 bottom locked
RC532 "011-472020-0" R1608-0603 65.5,151.75 r0 top locked
RC533 "011-472020-0" R1608-0603 65.5,158.75 r0 top locked
RC534 "011-102020-0" R1608-0603 65.5,155.75 r0 top locked
RC535 "011-472020-0" R1608-0603 73.25,155 r0 bottom locked
RC593 "011-494050-0" R3216-1206 10,141.25 r90 top locked
RC594 "011-491020-0" R1608-0603 109.5,100.75 r270 bottom locked
RC595 "011-101020-0" R1608-0603 94.25,160.5 r90 bottom locked
RC596 "011-101020-0" R1608-0603 95.75,160.5 r90 top locked
RC597 "011-491020-0" R1608-0603 100.5,102 r180 top locked
RC598 "011-103020-0" R1608-0603 111,100.75 r270 bottom locked
RC599 "011-102020-0" R1608-0603 39.25,131.25 r90 top locked
RC600 "011-103020-0" R1608-0603 114,103.75 r0 bottom locked
RC601 "011-202020-0" R1608-0603 106,100.5 r0 top locked
RC602 "011-103020-0" R1608-0603 117,102 r180 top locked
RC603 "011-202020-0" R1608-0603 100.5,100.5 r0 top locked
RC604 "011-272020-0" R1608-0603 102.75,108.75 r0 top locked
RC605 "011-103020-0" R1608-0603 116.5,106.25 r270 bottom locked
RC606 "011-272020-0" R1608-0603 97.5,100.75 r270 bottom locked
RC607 "011-102020-0" R1608-0603 43.5,134.25 r0 bottom locked
RC608 "011-102020-0" R1608-0603 106,83.75 r180 top locked
RC609 "011-103020-0" R1608-0603 114.5,101.25 r90 top locked
RC610 "011-493020-0" R1608-0603 47.75,135.75 r0 bottom locked
RC611 "011-102020-0" R1608-0603 101,83.75 r180 top locked
RC612 "011-103020-0" R1608-0603 104.25,100.75 r270 bottom locked
RC613 "011-103020-0" R1608-0603 99,100.75 r270 bottom locked
RC614 "011-102020-0" R1608-0603 40.25,128.25 r180 top locked
RC615 "011-102020-0" R1608-0603 47.75,132.75 r180 bottom locked
RC616 "011-101020-0" R1608-0603 97.25,160.5 r90 bottom locked
RC618 "011-472020-0" R1608-0603 102.75,110.25 r0 top locked
RC619 "011-472020-0" R1608-0603 102.75,106.25 r0 top locked
RC620 "011-491020-0" R1608-0603 130.5,85.75 r0 top locked
RC621 "011-491020-0" R1608-0603 121.25,85.25 r270 bottom locked
RC622 "011-472020-0" R1608-0603 59.75,175.25 r90 bottom locked
RC623 "011-202020-0" R1608-0603 127.1,85.75 r0 top locked
RC624 "011-475020-0" R1608-0603 109,173.25 r270 top locked
RC625 "011-472020-0" R1608-0603 116,106 r180 top locked
RC626 "011-272020-0" R1608-0603 131.25,85.25 r270 bottom locked
RC627 "011-202020-0" R1608-0603 119.75,85.25 r90 bottom locked
RC628 "011-102020-0" R1608-0603 120.25,100.5 r180 top locked
RC629 "011-491020-0" R1608-0603 108.25,188 r0 bottom locked
RC630 "011-103020-0" R1608-0603 129.75,85.25 r90 bottom locked
RC631 "011-101020-0" R1608-0603 85.75,167.5 r0 bottom locked
RC632 "011-101020-0" R1608-0603 85.75,164.5 r0 top locked
RC633 "011-101020-0" R1608-0603 85.75,164.5 r0 bottom locked
RC634 "011-102020-0" R1608-0603 117,100.5 r180 top locked
RC635 "011-472020-0" R1608-0603 93.25,102.5 r0 top locked
RC636 "011-472020-0" R1608-0603 111.5,188 r180 bottom locked
RC637 "011-491020-0" R1608-0603 96.75,100.5 r0 top locked
RC638 "011-491020-0" R1608-0603 107.5,85.25 r270 bottom locked
RC639 "011-472020-0" R1608-0603 111.75,182.75 r0 top locked
RC640 "011-202020-0" R1608-0603 93.5,100.5 r0 top locked
RC641 "011-202020-0" R1608-0603 106,85.25 r90 bottom locked
RC642 "011-272020-0" R1608-0603 90,100.75 r90 bottom locked
RC643 "011-272020-0" R1608-0603 115.25,85.25 r270 bottom locked
RC644 "011-101020-0" R1608-0603 85.75,170.5 r0 top locked
RC645 "011-101020-0" R1608-0603 85.75,170.5 r0 bottom locked
RC646 "011-101020-0" R1608-0603 85.75,167.5 r0 top locked
RC647 "011-472020-0" R1608-0603 116.75,169 r90 bottom locked
RC648 "011-472020-0" R1608-0603 123.25,169 r90 bottom locked
RC649 "011-102020-0" R1608-0603 109.5,100.5 r180 top locked
RC650 "011-102020-0" R1608-0603 97.25,83.75 r0 top locked
RC651 "011-103020-0" R1608-0603 113.75,85.25 r90 bottom locked
RC652 "011-103020-0" R1608-0603 92.25,100.75 r270 bottom locked
RC653 "011-472020-0" R1608-0603 102.25,177.75 r270 bottom locked
RC654 "011-472020-0" R1608-0603 77.25,166.75 r180 top locked
RC655 "011-101020-0" R1608-0603 86.75,160.5 r90 top locked
RC656 "011-101020-0" R1608-0603 85.25,160.5 r90 bottom locked
RC657 "011-101020-0" R1608-0603 89.75,160.5 r90 top locked
RC658 "011-472020-0" R1608-0603 77.25,168.25 r180 top locked
RC659 "011-472020-0" R1608-0603 77.5,164.25 r180 top locked
RC660 "011-472020-0" R1608-0603 58.25,175.25 r90 bottom locked
RC661 "011-472020-0" R1608-0603 60.75,210.25 r90 top locked
RC662 "011-472020-0" R1608-0603 93.25,106.5 r180 top locked
RC663 "011-472020-0" R1608-0603 93.25,104 r0 top locked
RC664 "011-331020-0" R1608-0603 77.25,169.75 r180 top locked
RC665 "011-472020-0" R1608-0603 59.25,210.25 r90 top locked
RC666 "011-101020-0" R1608-0603 88.25,160.5 r90 bottom locked
RC667 "011-101020-0" R1608-0603 91.25,160.5 r90 bottom locked
RC668 "011-101020-0" R1608-0603 92.75,160.5 r90 top locked
RC671 "011-472020-0" R1608-0603 93.25,108 r180 top locked
RC672 "011-102020-0" R1608-0603 84,187.5 r180 top locked
RC673 "011-472020-0" R1608-0603 17.5,200 r0 bottom locked
RC674 "011-472020-0" R1608-0603 17.5,200 r180 top locked
RC675 "011-472020-0" R1608-0603 96.25,166 r90 bottom locked
RC677 "011-102020-0" R1608-0603 84,186 r180 top locked
RC679 "011-472020-0" R1608-0603 17.5,202.5 r0 bottom locked
RC680 "011-472020-0" R1608-0603 17.5,202.5 r0 top locked
RC681 "011-102020-0" R1608-0603 84,181.5 r180 top locked
RC684 "011-472020-0" R1608-0603 65.5,165.5 r0 top locked
RC685 "011-472020-0" R1608-0603 65.5,164 r180 top locked
RC686 "011-472020-0" R1608-0603 73.5,164.25 r0 bottom locked
RC687 "011-472020-0" R1608-0603 77.5,162.75 r0 top locked
RC693 "011-202020-0" R1608-0603 85.75,172 r180 bottom locked
RC698 "011-492020-0" R1608-0603 100.5,193 r0 top locked
RC699 "011-492020-0" R1608-0603 100.5,191.5 r180 top locked
RC700 "011-492020-0" R1608-0603 100.5,187.75 r0 top locked
RC702 "011-221020-0" R1608-0603 100.5,189.25 r180 top locked
RC706 "011-472020-0" R1608-0603 59.25,146.5 r180 top locked
RC707 "011-333020-0" R1608-0603 17.75,147.5 r0 top locked
RC708 "011-333020-0" R1608-0603 17.75,144.5 r180 top locked
RC709 "011-333020-0" R1608-0603 30.25,145.25 r180 top locked
RC710 "011-333020-0" R1608-0603 30.25,143.75 r0 top locked
SC1 "NC/SC40(M3)" SC40_M3 10,5 r0 top locked
SC2 "NC/SC40(M3)" SC40_M3 132,5 r0 top locked
SC3 "NC/SC40(M3)" SC40_M3 132,111 r0 top locked
SC4 "NC/SC40(M3)" SC40_M3 132,255 r90 top locked
SC5 "NC/SC40(M3)" SC40_M3 10,255 r270 top locked
SC6 "SC40(M4)" SC50_M4-GND 10,98 r0 top locked
SC7 "NC" SC-MC 12.5,188 r0 top locked
SC8 "NC" SC-MC 131,193 r0 top locked
SW2 "073-200000-0" "SW DTSM-6" 37.75,142 r90 top locked
SW3 "073-010000-0" SW-DIP4 53,225.25 r0 top locked
TA1 "030-001000-0" EC39(8+8P)-1 69.25,40.5 r0 top locked
TP2 "NC" TEST-12 26.25,167.25 r0 top locked
TP3 "NC" TEST-12 106.5,137 r0 top locked
TP4 "NC" TEST-12 105.25,149.75 r0 top locked
TP5 "NC" TEST-12 27,148.75 r0 top locked
TP8 "NC" TEST-12 119,133 r0 top locked
TP9 "NC" TEST-12 113,149.75 r0 top locked
TP10 "NC" TEST-12 14.75,152.75 r0 top locked
TP12 "NC" TEST-12 20.75,164 r0 top locked
TP13 "NC" TEST-12 84.25,137.25 r0 top locked
TP14 "NC" TEST-12 97.75,216.75 r0 top locked
TP15 "NC" TEST-12 82.75,217.5 r0 top locked
TP17 "NC" TEST-12 104.25,217 r0 top locked
TP18 "NC" TEST-12 66.25,149.75 r0 top locked
TP19 "NC" TEST-12 90.5,137.25 r0 top locked
TP20 "NC" TEST-12 88.25,137.25 r0 top locked
TP24 "NC" TEST-12 24.5,135.5 r0 top locked
TP25 "NC" TEST-12 66.5,127.25 r0 top locked
TP30 "NC" TEST-12 70.75,128.5 r0 top locked
TP38 "NC" TEST-12 44.25,250 r180 top locked
TP57 "NC" TEST-12 41.75,103.75 r90 top locked
TP58 "NC" TEST-12 35,117.75 r90 top locked
TP59 "NC" TEST-12 35,125.25 r0 top locked
TP61 "NC" TEST-12 47.25,116.75 r0 top locked
TP62 "NC" TEST-12 53.25,129.25 r90 top locked
TP64 "NC" TEST-12 108.75,182 r0 top locked
TP65 "NC" TEST-12 104,182.25 r0 top locked
TP68 "NC" TEST-12 61,149.75 r0 top locked
UA10 "050-210030-0" SO8-5X4-PD 51.5,103.25 r180 top locked
UA11 "050-210030-0" SO8-5X4-PD 100,62 r180 top locked
UA12 "050-410010-0" SO8 21,72.75 r270 top locked
UA13 "050-610040-0" SO8 38,70.75 r270 top locked
UA14 "050-010000-0" LTV816SB-V 31.5,87.75 r180 top locked
UA20 "050-010000-0" LTV816SB-V 39.25,87.75 r180 top locked
UC1 "050-510030-0" SSOP-20 52.25,242 r270 top locked
UC2 "050-510030-0" SSOP-20 20.5,195 r270 top locked
UC3 "050-510030-0" SSOP-20 63.5,227.5 r270 top locked
UC4 "050-510040-0" TSOP-24 120.25,156.5 r0 top locked
UC12 "050-210000-0" SOT223#2 123,143.5 r180 top locked
UC14 "050-610312-0" SO16 109,156.75 r270 top locked
UC16 "050-610312-0" SO16 107.5,201.75 r270 top locked
UC19 "050-512010-0" SO8 65.75,132.25 r270 top locked
UC20 "050-410211-0" SQFP-176 58.25,193.25 r0 top locked
UC23 "050-412210-0" MSOP-8M 44.5,143.5 r270 top locked
UC46 "050-210100-0" TSSOP28-9.8X4.5-PD 40.75,109 r0 top locked
UC47 "050-210111-0" SOT-23 52.5,121.5 r0 top locked
UC48 "050-210120-0" SOT23-3 46.75,180.25 r270 bottom locked
UC50 "050-510021-0" SO14#1 71.25,155 r270 top locked
UC51 "050-510021-0" SO14#1 42,239 r270 top locked
UC52 "050-510021-0" SO14#1 42,224.75 r270 top locked
UC63 "050-010022-0" DIP-4-SM-P11-1 106,92 r180 top locked
UC64 "050-010022-0" DIP-4-SM-P11-1 100.5,92 r180 top locked
UC65 "050-512010-0" SO8 44.25,132.3 r270 top locked
UC66 "050-510201-0" SO14#1 109,106.5 r270 top locked
UC67 "050-010022-0" DIP-4-SM-P11-1 122.5,92 r0 top locked
UC68 "050-010022-0" DIP-4-SM-P11-1 117,92 r0 top locked
UC70 "050-010022-0" DIP-4-SM-P11-1 95,92 r180 top locked
UC71 "050-010022-0" DIP-4-SM-P11-1 111.5,92 r0 top locked
UC72 "050-510000-0" SO16 123.25,19.25 r180 top locked
UC73 "050-410210-0" SQFP50P-80 98,172 r0 top locked
UC76 "050-110011-0" SO8 94.25,192.25 r270 top locked
UC601 "050-510011-0" SO14#1 94.25,201.875 r270 top locked
UC603 "050-610311-0" SO14#1 66,239 r270 top locked
UC604 "050-510011-0" SO14#1 82,224.75 r270 top locked
UC605 "050-510011-0" SO14#1 24,202.5 r270 top locked
UC606 "050-610030-0" SO14#1 115,239 r270 top locked
UC607 "050-610030-0" SO14#1 98.5,239 r270 top locked
UC608 "050-610030-0" SO14#1 82,239 r270 top locked
UC609 "050-610030-0" SO14#1 28.75,239 r270 top locked
UC610 "050-610311-0" SO14#1 115,224.75 r270 top locked
UC611 "050-510230-0" SO14#1 128.25,224.75 r270 top locked
UC612 "050-510230-0" SO14#1 98.5,224.75 r270 top locked
UC614 "050-610040-0" SO8 28.75,225.25 r270 top locked
UC621 "050-612020-0" SO14#1 124.25,212.5 r270 top locked
UC622 "050-610030-0" SO14#1 24,177.75 r270 top locked
UC624 "050-612020-0" SO14#1 24,158 r270 top locked
UC625 "050-610000-0" SO8 107.5,212.5 r270 top locked
UC626 "050-610040-0" SO8 94.25,212.5 r270 top locked
UC627 "050-612020-0" SO14#1 65.75,119 r270 top locked
UC629 "050-612020-0" SO14#1 87,119 r270 top locked
UC630 "050-612020-0" SO14#1 109,119 r270 top locked
UC632 "050-612020-0" SO14#1 109,144.25 r270 top locked
UC633 "050-612020-0" SO14#1 87,131.25 r270 top locked
UC634 "050-612020-0" SO14#1 24,141.75 r270 top locked
UC635 "050-612020-0" SO14#1 109,131.25 r270 top locked
UC636 "050-610030-0" SO14#1 65.75,144 r270 top locked
UC637 "050-612020-0" SO14#1 87,144.25 r270 top locked
UC638 "050-612020-0" SO14#1 124.25,201.5 r270 top locked
UC641 "050-510011-0" SO14#2 71.25,166.75 r270 top locked
UC643 "050-510011-0" SO14#1 87,106.5 r270 top locked
VCC "NC" TEST-12 47.5,82.25 r90 top locked
VCC-AUX "NC" TEST-12 35.25,82.75 r0 top locked
Vd1 "NC" TEST-12 35.75,47.75 r180 top locked
Vref-5V "NC" TEST-12 26.25,84 r180 top locked
XLC1 "100-100000-0" XL49TSM_1 77.75,194 r270 top locked
YC1 "100-100010-0" XL5032SM 112.25,175 r270 top locked
ZDA1 "060-210010-0" SOD-123#1 31.25,100.75 r0 bottom locked
ZDC1 "NC" SOD-123#1 111.5,190 r180 top locked

## Footprints (in the part's own frame and the unit in brackets; to place one, negate y for a bottom-side part, rotate by r counter-clockwise, add the part's x,y. Pads: shape width x height; smd on the part's side, far side on the other; paste and mask are expansions set on the pad)
17KFUSE1812L110-33 [mm]
  rect 2x3.5 smd: 1(-2.564,0) 2(2.564,0)
  silkscreen extent -3.83,-2.01 3.84,2.01, body extent -2.9,-1.7 2.9,1.7, height 1.6
"Bar code box" [mm] "Bar code box 30X6mm"
  silkscreen extent -15.5,-3.5 15.5,3.5
C0603SM [mm] "C0603SM"
  rect 1x1 smd: 1(-0.8,0) 2(0.8,0)
  silkscreen extent -1.55,-0.75 1.55,0.75, body extent -1,-0.4 1,0.4, height 0.95
C0805SM [mm] "C0805SM"
  rect 1.1x1.5 smd: 1(-1,0) 2(1,0)
  silkscreen extent -1.8,-1 1.83,1, body extent -1.1,-0.7 1.1,0.7, height 1.45
C1206SM [mm] "C1206SM"
  rect 1.3x1.8 smd: 1(-1.45,0) 2(1.45,0)
  silkscreen extent -2.35,-1.15 2.35,1.18, body extent -1.7,-0.9 1.7,0.9, height 1.9
CC1608-0603 [mm] "Chip Capacitor, Body 1.6x0.8mm, IPC Medium Density"
  rect 1x1 smd: 1(-0.8,0) 2(0.8,0)
  silkscreen extent -1.55,-0.75 1.55,0.75, body extent -1,-0.4 1,0.4, height 0.95
CC2012-0805 [mm] "Chip Capacitor, Body 2.0x1.3mm, IPC Medium Density"
  rect 1.1x1.5 smd: 1(-1,0) 2(1,0)
  silkscreen extent -1.8,-1 1.83,1, body extent -1.1,-0.7 1.1,0.7, height 1.45
CC3216-1206 [mm] "Chip Capacitor, Body 3.2x1.6mm, IPC Medium Density"
  rect 1.3x1.8 smd: 1(-1.45,0) 2(1.45,0)
  silkscreen extent -2.35,-1.15 2.35,1.18, body extent -1.7,-0.9 1.7,0.9, height 1.9
CN2.5-3P [mm] "Wafer Body size:10*5.7mm/pitch:2.5mm/3P/S/T"
  rrect10% 1.6x1.6 hole 1: 1(-2.5,0)
  round 1.6 hole 1: 2(0,0) 3(2.5,0)
  silkscreen extent -6.35,-4 5,2.8, body extent -5.1,-4.1 5.1,2.6, height 7
CN2.5-4P#1 [mm] "Wafer Body size:12.5*5.7mm/pitch:2.5mm/4P/S/T"
  rrect10% 1.6x1.6 hole 1: 1(-3.75,0)
  round 1.6 hole 1: 2(-1.25,0) 3(1.25,0) 4(3.75,0)
  silkscreen extent -6.26,-4 6.25,4.3, body extent -6.3,-4.1 6.3,2.6, height 7
CN2.5-4P#2 [mm] "Wafer Body size:12.5*5.7mm/pitch:2.5mm/4P/S/T"
  rect 1.6x1.6 hole 1: 1(-3.75,0)
  round 1.6 hole 1: 2(-1.25,0) 3(1.25,0) 4(3.75,0)
  silkscreen extent -7.38,-4 6.25,2.5, body extent -6.3,-4.1 6.3,2.6, height 7
CN2.54-2*7P [mm] "Box header/Boby Size:35.22*8.9mm/pitch:2.54mm/2*7P/S/T"
  rrect10% 1.6x1.6 hole 1: 1(-7.62,-1.27)
  round 1.6 hole 1: 2(-7.62,1.27) 3(-5.08,-1.27) 4(-5.08,1.27) 5(-2.54,-1.27) 7(0,-1.27) 8(0,1.27) 9(2.54,-1.27) 10(2.54,1.27) 11(5.08,-1.27) 12(5.08,1.27) 13(7.62,-1.27) 14(7.62,1.27)
  round 0 hole 1 unplated: 6(-2.54,1.27)
  silkscreen extent -12.61,-4.5 12.61,4.5, body extent -12.8,-4.6 12.7,4.6, height 8.8
CN2.54-2*7P_2 [mm] "牛角端子/Body size:8.5*27.94mm /Pitch:2.54mm/2*7P"
  rrect10% 1.65x1.65 hole 1: 1(-7.62,-1.27)
  round 1.65 hole 1: 2(-7.62,1.27) 3(-5.08,-1.27) 4(-5.08,1.27) 5(-2.54,-1.27) 6(-2.54,1.27) 7(0,-1.27) 8(0,1.27) 9(2.54,-1.27) 10(2.54,1.27) 11(5.08,-1.27) 12(5.08,1.27) 13(7.62,-1.27) 14(7.62,1.27)
  silkscreen extent -25.25,-5.1 25.26,4.25, body extent -18.74,-4.3 18.77,4.3, height 17
CN2.54-2*10P_2 [mm] "牛角端子/Pitch:2.54mm/2*10P"
  rect 1.65x1.65 hole 1: 1(-11.43,-1.27)
  round 1.65 hole 1: 2(-11.43,1.27) 3(-8.89,-1.27) 4(-8.89,1.27) 5(-6.35,-1.27) 6(-6.35,1.27) 7(-3.81,-1.27) 8(-3.81,1.27) 9(-1.27,-1.27) 10(-1.27,1.27) 11(1.27,-1.27) 12(1.27,1.27) 13(3.81,-1.27) 14(3.81,1.27) 15(6.35,-1.27) 16(6.35,1.27) 17(8.89,-1.27) 18(8.89,1.27) 19(11.43,-1.27) 20(11.43,1.27)
  silkscreen extent -29.04,-5.1 29.04,4.25, body extent -22.5,-4.3 22.5,4.3, height 17
CN2.54-2*20P#1 [mm] "牛角端子/Body size:8.5*70mm /Pitch:2.54mm/2*20P"
  rrect10% 1.65x1.65 hole 1: 1(-24.13,-1.27)
  round 1.65 hole 1: 2(-24.13,1.27) 3(-21.59,-1.27) 4(-21.59,1.27) 5(-19.05,-1.27) 6(-19.05,1.27) 7(-16.51,-1.27) 8(-16.51,1.27) 9(-13.97,-1.27) 10(-13.97,1.27) 11(-11.43,-1.27) 12(-11.43,1.27) 13(-8.89,-1.27) 14(-8.89,1.27) 15(-6.35,-1.27) 16(-6.35,1.27) 17(-3.81,-1.27) 18(-3.81,1.27) 19(-1.27,-1.27) 20(-1.27,1.27) 21(1.27,-1.27) 22(1.27,1.27) 23(3.81,-1.27) 24(3.81,1.27) 25(6.35,-1.27) 26(6.35,1.27) 27(8.89,-1.27) 28(8.89,1.27) 29(11.43,-1.27) 30(11.43,1.27) 31(13.97,-1.27) 32(13.97,1.27) 33(16.51,-1.27) 34(16.51,1.27) 35(19.05,-1.27) 36(19.05,1.27) 37(21.59,-1.27) 38(21.59,1.27) 39(24.13,-1.27) 40(24.13,1.27)
  silkscreen extent -45.7,-5.02 45.7,4.25, body extent -35.3,-4.3 35.3,4.3, height 17